# Altium PCB PCB1.PcbDoc (part 2 of 2)
Units mm, origin at the board's own origin, x right, y up, seen from the top; angles counter-clockwise.
Board outline 142.1 x 63.5 mm, 2 copper layers (Top Layer, Bottom Layer); 91 components, 105 nets, 352 pads, 86 vias.
Unrouted connection lines stored in the file: 3.
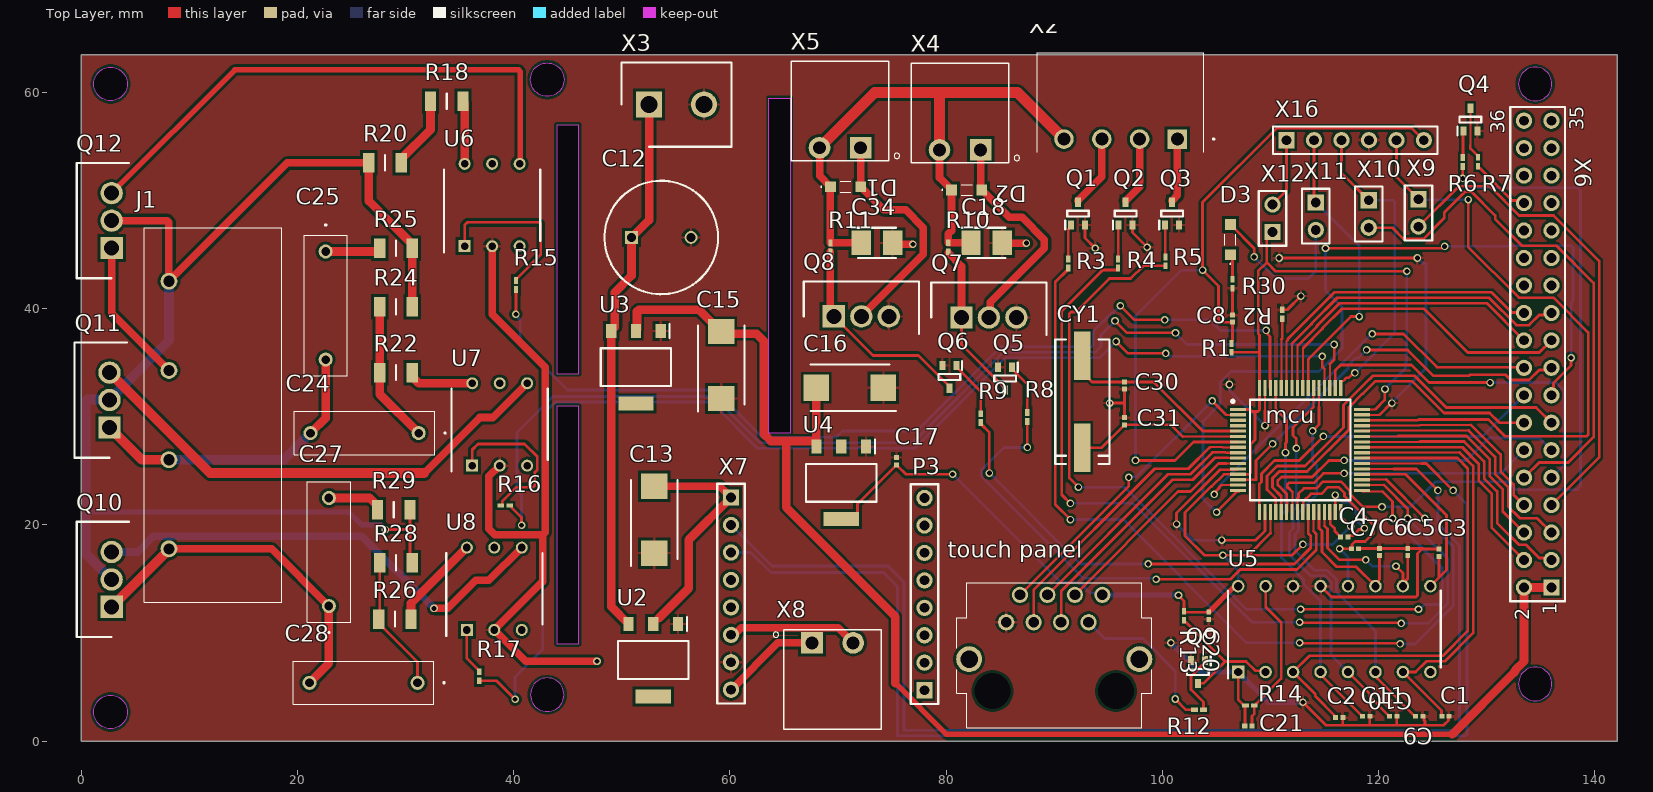
[diagram p0: Top Layer view]

## Via types
v1: diameter 0.7, hole 0.45, Top Layer to Bottom Layer, 86 vias

## Nets (pads, with @x,y where several pads share a name; then routed paths per layer and width w, separated by ;. In a path a pad name is that pad's centre, name@x,y a point inside that pad or via, vN(x,y) a via of type N, cw(c..) or ccw(c..) an arc to the next point about the centre after c; other vN are vias at no path point) (continued)
X2_Q2: Q2.3 X2.2 | length 6.4
  Top Layer w0.254: Q2.3 Q2.3@96.6,50
  Top Layer w0.7: Q2.3@96.6,50 97.9,51.3 X2.2
X2_Q3: Q3.3 X2.1 | length 6.1
  Top Layer w0.254: Q3.3 Q3.3@100.9,50
  Top Layer w0.7: Q3.3@100.9,50 101.4,50.5 X2.1
X7.6_X8.2: X7.6 X8.2 | length 12.1
  Top Layer w0.254: X7.6 X7.6@60.417,9.84
  Top Layer w0.7: X7.6@60.417,9.84 61.058,10.481 70.024,10.481 X8.2
X7_X8: X7.8 X8.1 | length 9.3
  Top Layer w0.7: X7.8 64.44,9.1 X8.1
X9: X6.7 X9.2 | length 45.5
  Top Layer w0.254: X9.2 127.439,51.339 130.302,51.339 133.005,48.635 136.204,48.635 140.416,44.423 140.416,26.256 X6.7
X10: X6.10 X10.2 | length 49.3
  Top Layer w0.254: X10.2 121.287,47.5 122.318,46.469 124.168,46.469 126.083,48.383 126.083,48.917 127.997,50.831 128.603,50.831 130.797,48.637 130.797,48.303 133.27,45.831 136.468,45.831 139.908,42.391 139.908,28.138 137.559,25.789 134.869,25.789 X6.10
X12_X16: X12.2 X16.1 | length 6.5
  Top Layer w0.254: X12.2 111.5,50.94 X16.1
pads on no net: "touch panel.MH1" "touch panel.MH2" "touch panel.MH3" "touch panel.MH4" mcu.3 mcu.4 P3.1 P3.2 P3.3 P3.4 P3.5 P3.6 P3.7 P3.8 U2.4 U3.4 U4.2 U5.8 U6.3 U6.5 U7.3 U7.5 U8.3 U8.5 X6.23 X6.24 X6.25 X6.26 X6.27 X6.28 X6.29 X6.31 X6.32 X6.33 X6.34 X6.35 X6.36 X7.4 X7.5

## Polygon pours and split planes (outlines as drawn)
pin12 on Bottom Layer "NONET_L-01_P-001" (solid, pour order 0): 0,63.5 0,0.1 142.1,0.1 142.1,63.5
pin12 on Top Layer "NONET_L-01_P-001" (solid, pour order 1): 0,63.5 0,0 142.1,0 142.1,63.5

## Other copper
Multi-Layer:
  pour cut-out: 132.948,60.8 ccw(c134.5,60.8) 134.5,59.248 ccw(c134.5,60.8) 136.052,60.8 ccw(c134.5,60.8) 134.5,62.352 ccw(c134.5,60.8)

## Text inside footprints (layer, text, board x,y; h text height)
X6: Top Overlay "2" at 133.968,11.172 h1.27 r90; Top Overlay "1" at 136.508,11.68 h1.27 r90; Top Overlay "35" at 139,56.5 h1.27 r90; Top Overlay "36" at 131.7,56.2 h1.27 r90